# Altium PCB pcbSPI.PcbDoc
Units mm, origin at the board's own origin, x right, y up, seen from the top; angles counter-clockwise.
Board outline 48.32 x 49.53 mm, 2 copper layers (Top Layer, Bottom Layer); 14 components, 17 nets, 57 pads, 0 vias.
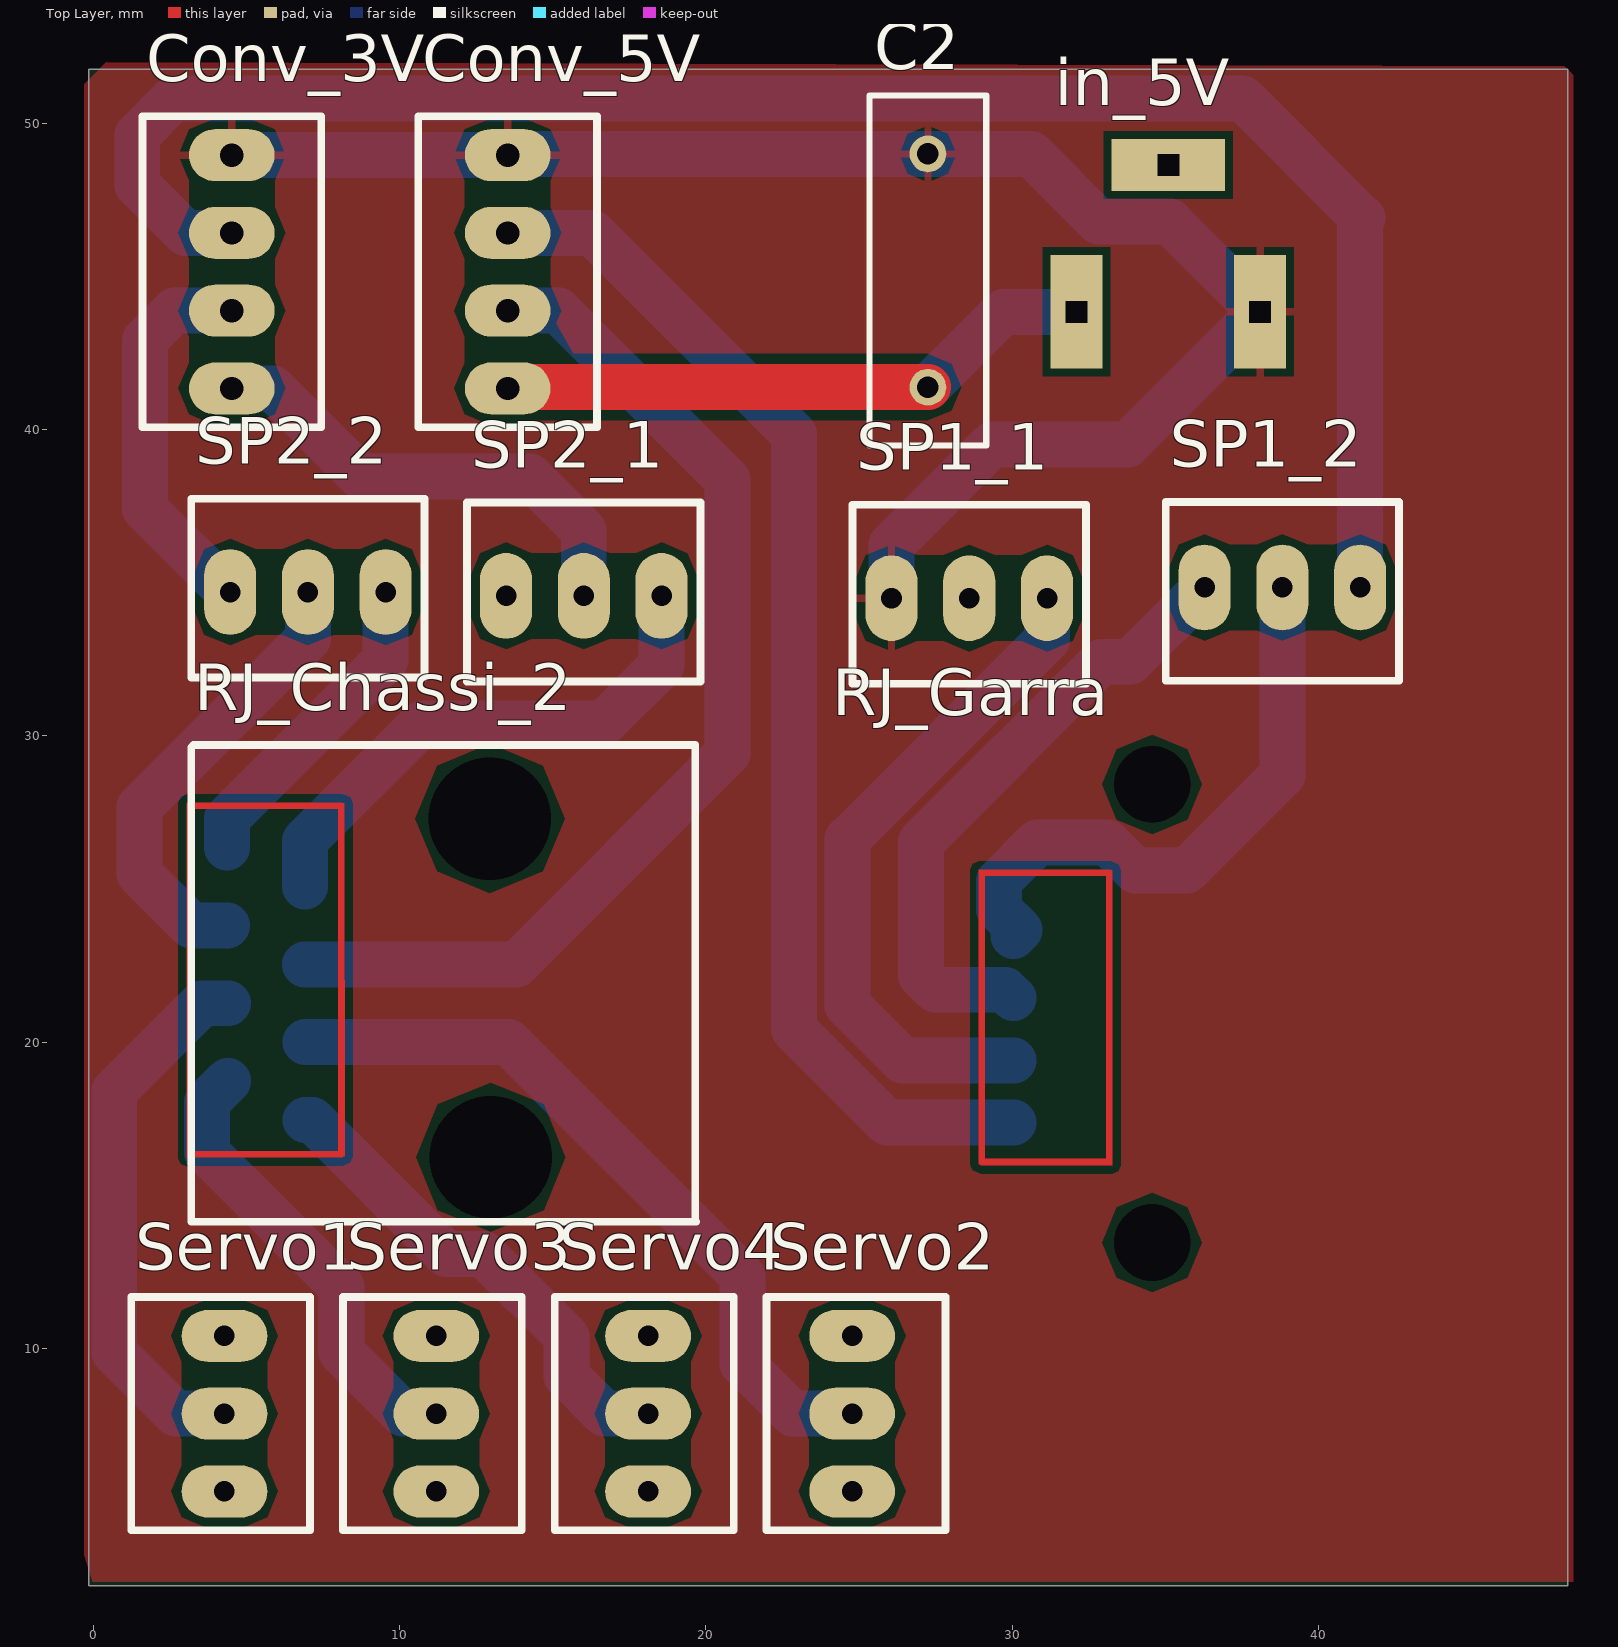
[diagram p0: Top Layer view]
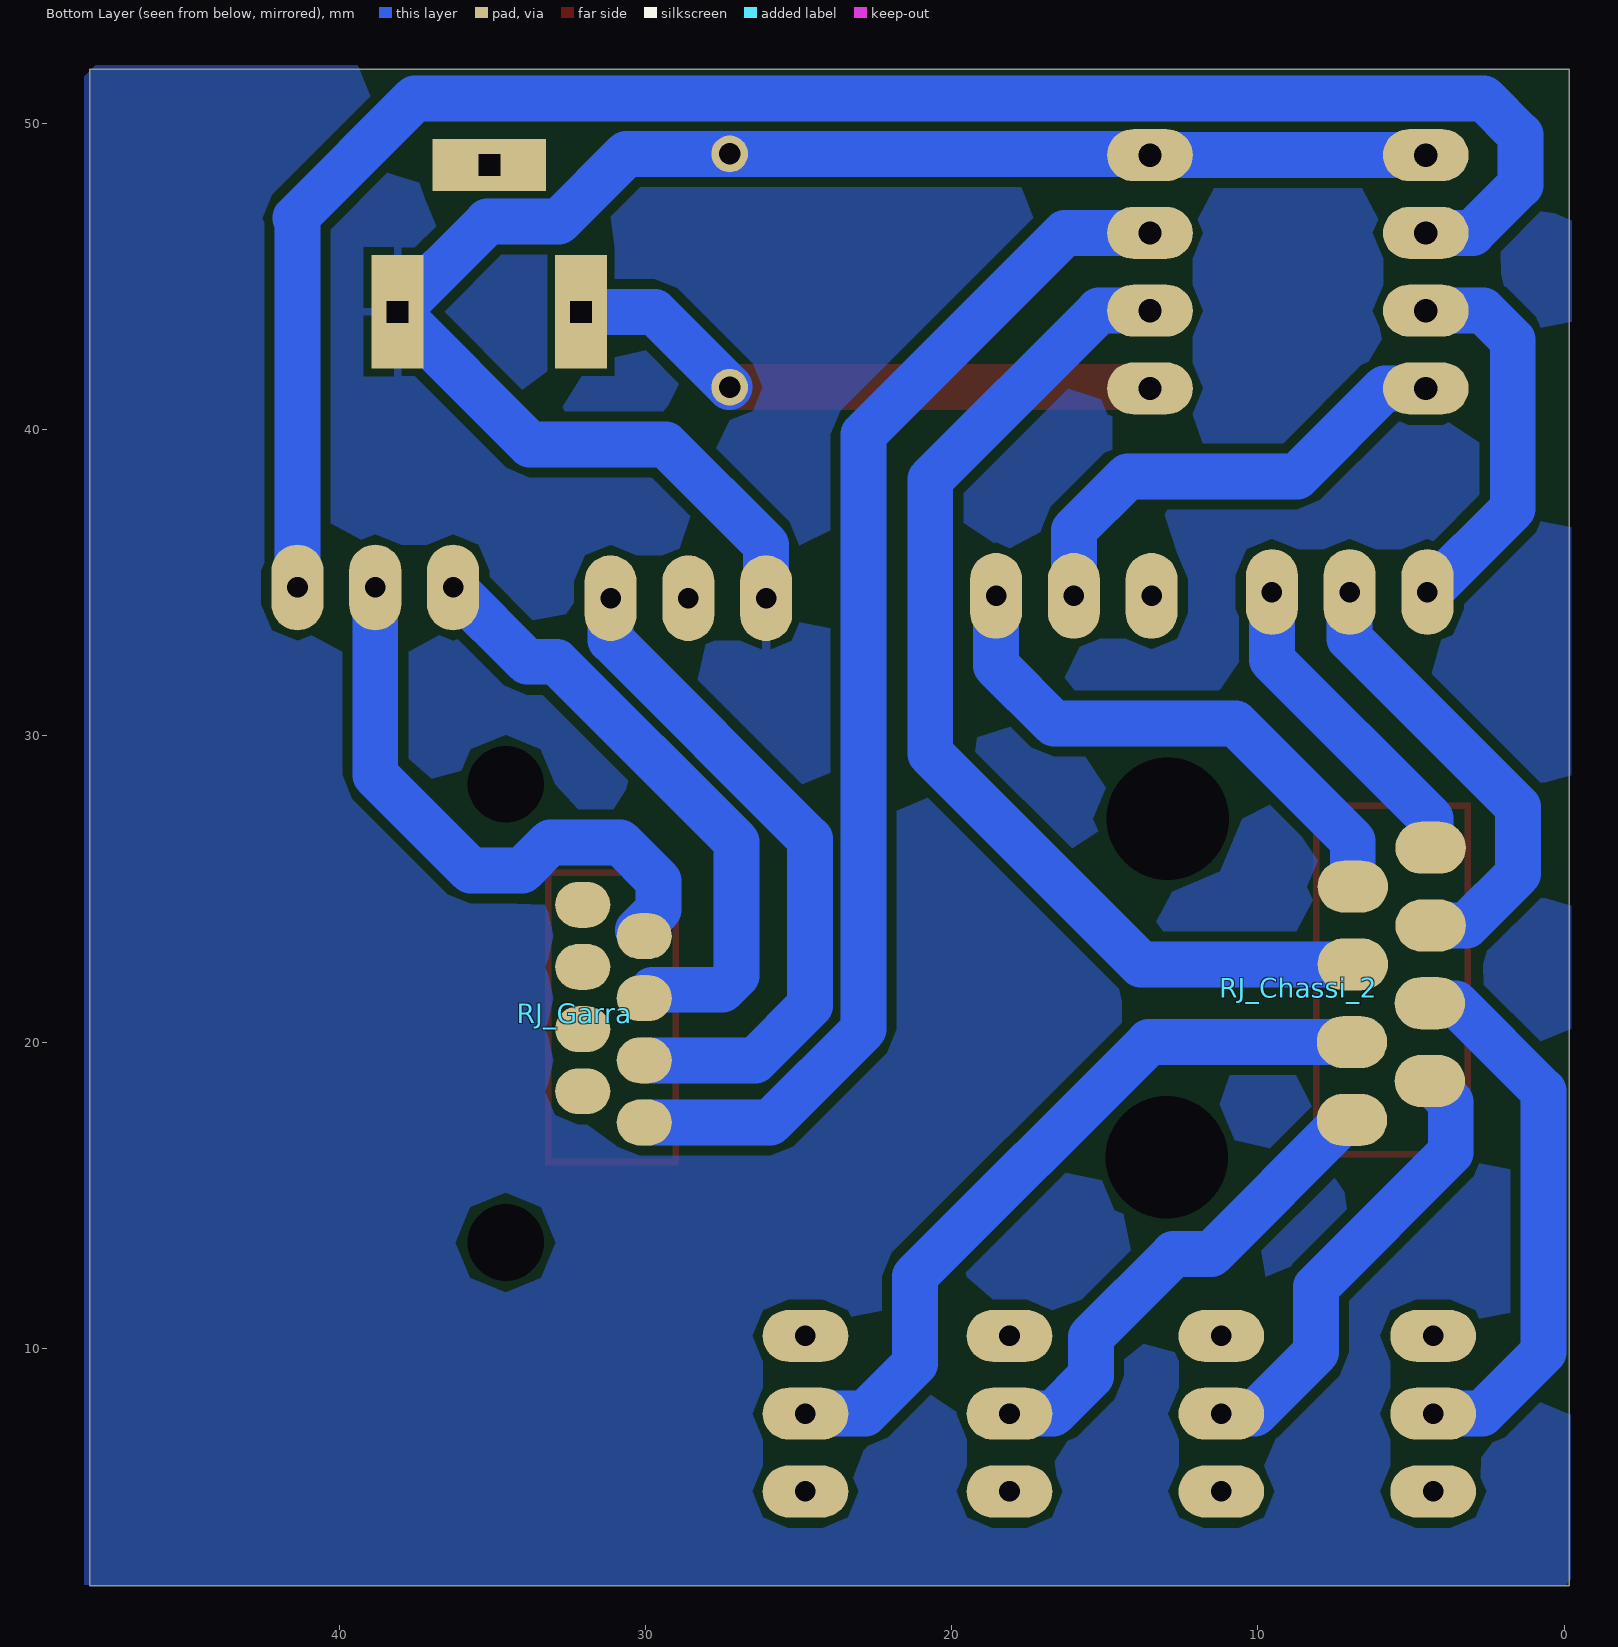
[diagram p1: Bottom Layer view, seen from below]
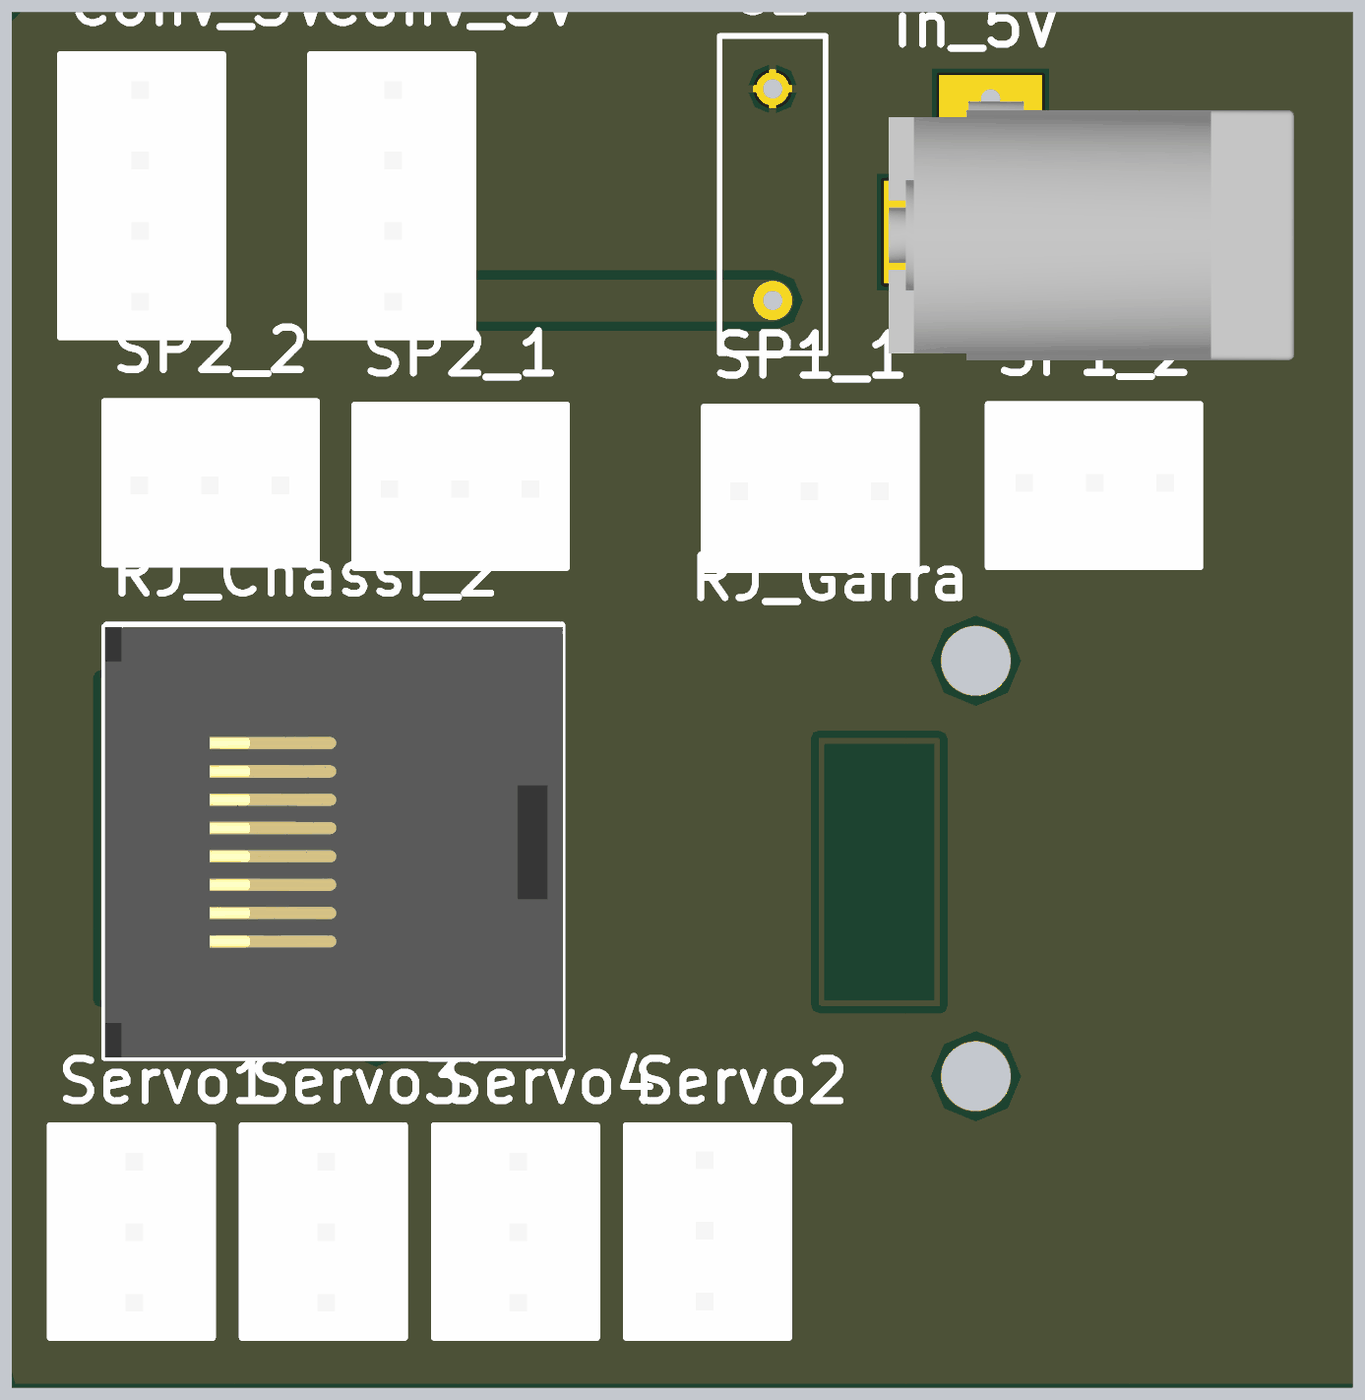
[diagram p2: 3D render of the assembled board from above, using the file's embedded part models]

## Layer stack, top to bottom
Top Solder: solder mask 0.0102, Solder Resist, Dk 3.5
Top Layer: signal copper 0.0356
Dielectric 1: dielectric 0.32, FR-4, Dk 4.8
Bottom Layer: signal copper 0.0356
Bottom Solder: solder mask 0.0102, Solder Resist, Dk 3.5

## Board outline
-0.166,2.25 48.15,2.25 48.15,51.775 -0.166,51.775

## Design rules (kind name [scope] priority, off if disabled: settings)
Clearance [All] p1: gap=0.254 ignorepadtopadclearanceinfootprint=FALSE except(0: Arc-Hole Track-Hole SMDPad-Hole THPad-Hole Via-Hole Fill-Hole Poly-Hole Region-Hole Text-Hole)
PolygonConnect [All] p1: connectstyle=Relief reliefconductorwidth=0.254 reliefentries=4 polygonreliefangle="90 Angle" airgapwidth=0.254
RoutingVias [All] p1: holewidth=0.711 width=1.27 viastyle="Through Hole" minholewidth=0.711 minwidth=1.27 maxholewidth=0.711 maxwidth=1.27
SolderMaskExpansion [All] p1: expansion=0.102
Width [All] p1: maxlimit=2 minlimit=0.254 preferedwidth=1.5
30 further rules are at their usual default settings.

## Components (designator, comment, footprint, x,y, rotation, side; value= is the part's Value field where it differs from the comment)
C2 "Cap" RAD-0.3 27.25,45.2 r270 top value=100pF
Conv_3V "KK4" 4-vias 4.515,48.97 r0 top
Conv_5V "KK4" 4-vias 13.525,41.35 r180 top
in_5V "Jack" "JACK J4" 38.1,43.85 r180 top
RJ_Chassi_2 "RJ45" RJ45_90 16.018,26.604 r270 top
RJ_Garra "RJ45" RJ45_Simples 34.57,14.585 r90 top
Servo1 "KK3" 3-vias 4.275,7.865 r180 top
Servo2 "KK3" 3-vias 24.775,7.865 r0 top
Servo3 "KK3" 3-vias 11.193,7.865 r180 top
Servo4 "KK3" 3-vias 18.111,7.865 r180 top
SP1_1 "KK3" 3-vias 28.6,34.5 r90 top
SP1_2 "KK3" 3-vias 38.825,34.85 r270 top
SP2_1 "KK3" 3-vias 16.01,34.575 r90 top
SP2_2 "KK3" 3-vias 7,34.7 r90 top

## Footprints (in the part's own frame and the unit in brackets; to place one, negate y for a bottom-side part, rotate by r counter-clockwise, add the part's x,y. Pads: shape width x height; smd on the part's side, far side on the other; paste and mask are expansions set on the pad)
3-vias [mm]
  oval 2.8x1.7 hole 0.67 unplated: 1(0,2.54) 2(0,0) 3(0,-2.54)
  silkscreen extent -2.79,-3.81 3.05,3.81, body extent -2.84,-3.78 3,3.84, height 11.7
4-vias [mm]
  oval 2.8x1.7 hole 0.76 unplated: 1(0,0) 2(0,-2.54) 3(0,-5.08) 4(0,-7.62)
  silkscreen extent -2.92,-8.89 2.92,1.27, body extent -2.92,-8.89 2.92,1.27, height 11.7
"JACK J4" [mm]
  rect 1.7x3.7 hole 0.7 square: 1(6,0) 2(0,0)
  rect 3.7x1.7 hole 0.7 square: 3(3,-4.8)
  body extent -7.94,-4.71 6.68,4.61, height 11
RAD-0.3 [mm] "Radial Cap, Thru-Hole; 2 Leads; 0.3 in Pin Spacing"
  round 1.2 hole 0.7: 1(-3.81,0) 2(3.81,0)
  silkscreen extent -5.71,-1.91 5.71,1.91
RJ45_90 [mil]
  oval 66.93x90.55 smd far side: 1(360,-358) 2(310,-458) 3(260,-358) 4(210,-458) 5(160,-359) 6(110,-459) 7(60,-359) 8(10,-459)
  round 60 hole 157.48: HOLE(-27.4,-121) HOLE(408.03,-120)
  Top Layer region: -47,-308.02 -47,-316 407,-316.01 407,-307.97
  Top Layer region: 400,-310 400,-509 408,-509 408,-310
  Top Layer region: -47,-503.03 -47,-511.01 409,-511.02 409,-502.98
  Top Layer region: -48,-311 -48,-510 -40,-510 -40,-311
  silkscreen extent -122,-505 491,144, body extent -119,-505 491,145, height 630
RJ45_Simples [mm] "Sem led nessas porra - 8P8C"
  oval 1.5x1.8 smd far side: 1(9.9,2.52) 2(8.88,4.53) 3(7.87,2.52) 4(6.85,4.53) 5(5.84,2.52) 6(4.82,4.53) 7(3.81,2.52) 8(2.79,4.53)
  round 0 hole 2.5: HOLE(-1.13,0) HOLE(13.83,0)
  Top Layer region: 1.422,5.664 1.422,5.461 11.049,5.461 11.049,5.665
  Top Layer region: 10.846,5.639 10.846,1.346 11.049,1.346 11.049,5.639
  Top Layer region: 1.397,1.498 1.397,1.295 11.024,1.295 11.024,1.499
  Top Layer region: 1.397,5.588 1.397,1.295 1.6,1.295 1.6,5.588
  body extent -1.55,-5.51 14.25,10.69, height 12.84

## Part data
C2: "Capacitor", LatestRevisionDate=17-Jul-2002, LatestRevisionNote="Re-released for DXP Platform.", PackageDescription="Radial Cap, Thru-Hole; 2 Leads; 0.3 in Pin Spacing", PackageReference=RAD-0.3, Published=8-Jun-2000, Publisher="Altium Limited"
Conv_3V Conv_5V: library part KK4Vias, ComponentLink1Description=Fabricante, ComponentLink1URL=https://www.molex.com/molex/products/family?key=kk_254_rpc_connector_system&channel=products&chanName=family&pageTitle=Introduction&parentKey=kk_interconnect_solutions
RJ_Chassi_2: library part RJ45_90
Servo1 Servo2 Servo3 Servo4 SP1_1 SP1_2 SP2_1 SP2_2: library part KK3Vias

## Nets (pads, with @x,y where several pads share a name; then routed paths per layer and width w, separated by ;. In a path a pad name is that pad's centre, name@x,y a point inside that pad or via, vN(x,y) a via of type N, cw(c..) or ccw(c..) an arc to the next point about the centre after c; other vN are vias at no path point)
5V: C2.2 Conv_5V.1 in_5V.1 | length 19.6
  Top Layer w1.5: Conv_5V.1 13.565,41.39 C2.2
  Bottom Layer w1.5: C2.2 29.71,43.85 in_5V.1
CLK_1: RJ_Garra.2 SP1_2.2 | length 19.7
  Bottom Layer w1.5: RJ_Garra.2 30.24,23.665 29.575,24.329 29.575,25.271 30.829,26.525 33.108,26.525 34.033,25.6 35.7,25.6 38.825,28.725 SP1_2.2
CLK_2: RJ_Chassi_2.6 SP2_2.2 | length 15
  Bottom Layer w1.5: RJ_Chassi_2.6 3.19,23.81 1.5,25.5 1.5,27.675 7,33.175 SP2_2.2
GND: C2.1 Conv_3V.1 Conv_5V.4 in_5V.2 SP1_1.1 | length 52.7
  Bottom Layer w1.5: Conv_3V.1 Conv_5V.4 13.565,49.01 C2.1 30.62,49.01 32.834,46.796 35.154,46.796 in_5V.2 33.775,39.525 29.35,39.525 26.06,36.235 SP1_1.1
MISO_1: Conv_3V.2 SP1_2.1 | length 59.6
  Bottom Layer w1.5: Conv_3V.2 2.995,46.43 1.425,48 1.425,49.625 2.624,50.824 37.526,50.824 41.438,46.912 41.365,46.84 SP1_2.1
MISO_2: Conv_3V.3 SP2_2.1 | length 12.7
  Bottom Layer w1.5: SP2_2.1 4.4,34.7 1.675,37.425 1.675,42.925 2.64,43.89 Conv_3V.3
MOSI_1: RJ_Garra.6 SP1_1.3 | length 22.2
  Bottom Layer w1.5: RJ_Garra.6 26.42,19.405 24.629,21.196 24.629,26.629 31.14,33.14 SP1_1.3
MOSI_2: RJ_Chassi_2.7 SP2_1.3 | length 17.8
  Bottom Layer w1.5: RJ_Chassi_2.7 6.9,26.575 10.725,30.4 16.65,30.4 18.55,32.3 SP2_1.3
NetConv_3V_4: Conv_3V.4 SP2_1.2 | length 15.6
  Bottom Layer w1.5: Conv_3V.4 5.85,41.35 8.725,38.475 14.25,38.475 16.01,36.715 SP2_1.2
NetConv_5V_2: Conv_5V.2 RJ_Chassi_2.5 | length 35.1
  Bottom Layer w1.5: RJ_Chassi_2.5 13.815,22.54 20.7,29.425 20.7,38.375 15.185,43.89 Conv_5V.2
NetConv_5V_3: Conv_5V.3 RJ_Garra.8 | length 39.9
  Bottom Layer w1.5: Conv_5V.3 16.295,46.43 22.875,39.85 22.875,20.425 25.925,17.375 RJ_Garra.8
Servo1: RJ_Chassi_2.4 Servo1.2 | length 17.9
  Bottom Layer w1.5: Servo1.2 2.685,7.865 0.675,9.875 0.675,18.4 3.545,21.27 RJ_Chassi_2.4
Servo2: RJ_Chassi_2.3 Servo2.2 | length 24.5
  Bottom Layer w1.5: RJ_Chassi_2.3 13.55,20 21.2,12.35 21.2,9.5 22.835,7.865 Servo2.2
Servo3: RJ_Chassi_2.2 Servo3.2 | length 14.9
  Bottom Layer w1.5: RJ_Chassi_2.2 3.7,18.045 3.7,16.4 8.1,12 8.1,9.875 10.11,7.865 Servo3.2
Servo4: RJ_Chassi_2.1 Servo4.2 | length 15.9
  Bottom Layer w1.5: RJ_Chassi_2.1 7.14,17.46 11.525,13.075 12.75,13.075 15.45,10.375 15.45,9.1 16.685,7.865 Servo4.2
SS_1: RJ_Garra.4 SP1_2.3 | length 20.4
  Bottom Layer w1.5: RJ_Garra.4 29.764,21.711 27.493,21.711 27.025,22.179 27.025,26.538 32.91,32.423 33.858,32.423 SP1_2.3
SS_2: RJ_Chassi_2.8 SP2_2.3 | length 10.5
  Bottom Layer w1.5: RJ_Chassi_2.8 4.36,27.31 9.54,32.49 SP2_2.3
pads on no net: in_5V.3 RJ_Chassi_2.HOLE RJ_Garra.1 RJ_Garra.3 RJ_Garra.5 RJ_Garra.7 RJ_Garra.HOLE Servo1.1 Servo1.3 Servo2.1 Servo2.3 Servo3.1 Servo3.3 Servo4.1 Servo4.3 SP1_1.2 SP2_1.1

## Polygon pours and split planes (outlines as drawn)
GND on Top Layer "GND_L01_P-001" (solid, remove dead copper, pour order 4): -0.3,52 -0.3,2.35 -0.175,2.225 -0.025,2.375 48.325,2.375 48.325,51.575 48.025,51.875
GND on Top Layer "GND_L01_P-001" (solid, remove dead copper, pour order 2): 51.075,24.35
GND on Bottom Layer "GND_L01_P-001" (solid, pour order 8): -0.25,51.9 47.95,51.9 48.325,51.525 48.325,2.275 -0.05,2.275 -0.225,2.45